# Altium PCB Arduino_DIY_V1.0.PcbDoc (part 3 of 3)
Units mil, origin at the board's own origin, x right, y up, seen from the top; angles counter-clockwise.
Board outline 4035.9 x 4932.05 mil, 2 copper layers (Top Layer, Bottom Layer), stack 46.063 mil thick; 122 components, 93 nets, 431 pads, 264 vias.
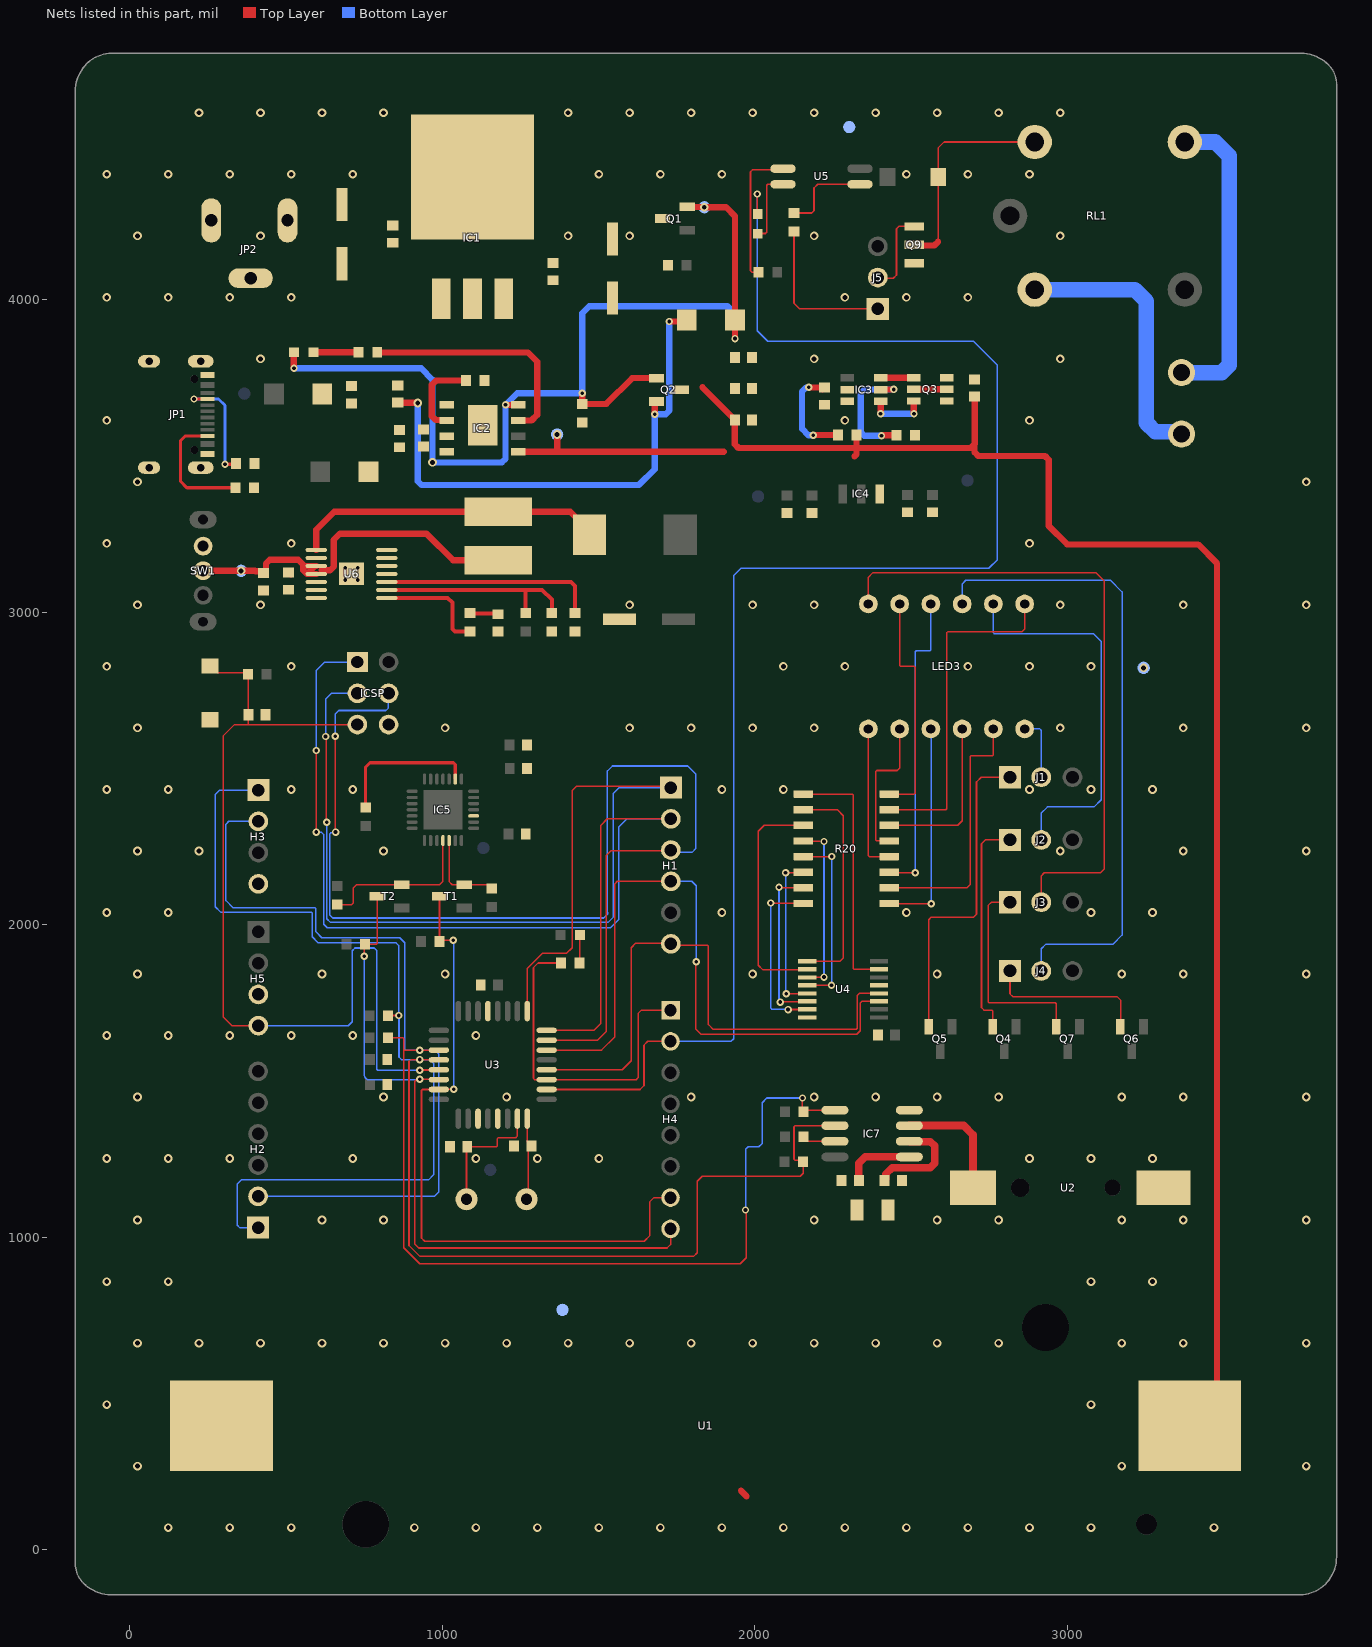
[diagram p2: the nets of this part, all layers, seen from the top]

## Via types
v1: diameter 27.56, hole 15.75, Top Layer to Bottom Layer, tented both sides, 182 vias
v2: diameter 23.62, hole 11.81, Top Layer to Bottom Layer, tented both sides, 69 vias
v3: diameter 27.56, hole 15.75, Top Layer to Bottom Layer, tented top, 9 vias
v4: diameter 24, hole 12, Top Layer to Bottom Layer, tented both sides, 4 vias

## Nets (pads, with @x,y where several pads share a name; then routed paths per layer and width w, separated by ;. In a path a pad name is that pad's centre, name@x,y a point inside that pad or via, vN(x,y) a via of type N, cw(c..) or ccw(c..) an arc to the next point about the centre after c; other vN are vias at no path point) (continued)
GND: C1.1 C2.1 C3.2 C4.2 C5.1 C6.1 C7.1 C9.1 C10.1 C11.1 C13.1 C14.1 C15.2 C16.1 C17.1 C18.1 C19.1 C20.1 C21.1 C22.1 C23.1 C24.1 C25.2 C26.2 C27.1 C28.1 C29.1 C30.2 C31.2 C32.2 C33.2 H3.4 H5.3 IC1.2 IC1.4 IC2.1 IC2.3 IC2.9 IC4.1 IC5.3 IC7.4 ICSP.4 JP1.17 JP1.18 JP1.19 JP1.20 JP1.A12B1 JP1.B12A1 JP2.2 JP2.3 Q3.1 Q9.3 R1.1 R2.1 R3.1 R6.1 R7.1 R8.1 R26.1 R27.1 RESET.2 TP9.1 TP10.1 TP11.1 U2.2 U3.3 U3.5 U3.21 U4.8 U4.13 U6.6 U6.7 U6.11 U6.12 U6.13 U6.14 U6.15
  other v1: 123.65,70.69 320.5,70.69 517.35,70.69 911.05,70.69 1107.9,70.69 1304.75,70.69 1501.6,70.69 1698.45,70.69 1895.3,70.69 2092.15,70.69 2289,70.69 2485.85,70.69 2682.7,70.69 2879.55,70.69 3076.4,70.69 3470.1,70.69 25.22,267.54 3174.83,267.54 3765.38,267.54 -73.2,464.39 3076.4,464.39 25.22,661.24 222.07,661.24 418.92,661.24 615.77,661.24 812.62,661.24 1009.47,661.24 1206.32,661.24 1403.17,661.24 1600.02,661.24 1796.87,661.24 1993.72,661.24 2190.57,661.24 2387.43,661.24 2584.28,661.24 2781.13,661.24 3174.83,661.24 3371.68,661.24 3765.38,661.24 -73.2,858.09 123.65,858.09 3076.4,858.09 3273.25,858.09 25.22,1054.94 615.77,1054.94 812.62,1054.94 2190.57,1054.94 2584.28,1054.94 2781.13,1054.94 3174.83,1054.94 3371.68,1054.94 3765.38,1054.94 -73.2,1251.8 123.65,1251.8 320.5,1251.8 714.2,1251.8 1107.9,1251.8 1304.75,1251.8 1501.6,1251.8 2879.55,1251.8 3076.4,1251.8 3273.25,1251.8 25.22,1448.65 812.62,1448.65 1206.32,1448.65 1796.87,1448.65 2190.57,1448.65 2387.43,1448.65 2584.28,1448.65 2781.13,1448.65 3174.83,1448.65 3371.68,1448.65 3765.38,1448.65 -73.2,1645.5 123.65,1645.5 320.5,1645.5 517.35,1645.5 714.2,1645.5 1107.9,1645.5 25.22,1842.35 615.77,1842.35 1009.47,1842.35 1993.72,1842.35 2584.28,1842.35 3174.83,1842.35 3371.68,1842.35 3765.38,1842.35 -73.2,2039.2 123.65,2039.2 1895.3,2039.2 2485.85,2039.2 3076.4,2039.2 3273.25,2039.2 25.22,2236.05 222.07,2236.05 812.62,2236.05 2977.98,2236.05 3371.68,2236.05 3765.38,2236.05 -73.2,2432.9 123.65,2432.9 517.35,2432.9 714.2,2432.9 1895.3,2432.9 2092.15,2432.9 2879.55,2432.9 3076.4,2432.9 3273.25,2432.9 25.22,2629.75 1009.47,2629.75 1600.02,2629.75 1796.87,2629.75 1993.72,2629.75 2190.57,2629.75 2977.98,2629.75 3371.68,2629.75 3765.38,2629.75 -73.2,2826.6 517.35,2826.6 2092.15,2826.6 2289,2826.6 2682.7,2826.6 2879.55,2826.6 3076.4,2826.6 25.22,3023.45 418.92,3023.45 1600.02,3023.45 1993.72,3023.45 2190.57,3023.45 2977.98,3023.45 3371.68,3023.45 3765.38,3023.45 -73.2,3220.3 517.35,3220.3 2879.55,3220.3 25.22,3417.15 3765.38,3417.15 -73.2,3614 2289,3614 2879.55,3614 418.92,3810.85 2190.57,3810.85 2977.98,3810.85 -73.2,4007.7 123.65,4007.7 320.5,4007.7 517.35,4007.7 2289,4007.7 2485.85,4007.7 2682.7,4007.7 25.22,4204.55 418.92,4204.55 1403.17,4204.55 1600.02,4204.55 2190.57,4204.55 2977.98,4204.55 -73.2,4401.4 123.65,4401.4 320.5,4401.4 517.35,4401.4 714.2,4401.4 1501.6,4401.4 1698.45,4401.4 1895.3,4401.4 2485.85,4401.4 2682.7,4401.4 2879.55,4401.4 222.07,4598.25 418.92,4598.25 615.77,4598.25 812.62,4598.25 1403.17,4598.25 1600.02,4598.25 1796.87,4598.25 1993.72,4598.25 2190.57,4598.25 2387.43,4598.25 2584.28,4598.25 2781.13,4598.25 2977.98,4598.25
  other v3: 3245,2822
  other v4: 690.46,3102.8 729.83,3102.8 690.46,3142.17 729.83,3142.17
MISO: H1.2 ICSP.1 U3.16 | length 3457
  Top Layer w5: v2@597.15,2295.49 v2(597.15,2557.49) ; U3.16@1334.65,1661.73 1485.38,1661.73 1508.15,1684.49 1508.15,2318.49 1528.5,2338.85 H1.2@1731.94,2338.85
  Bottom Layer w5: v2@597.15,2295.49 614.15,2295.49 621.14,2288.51 621.14,2001.51 632.15,1990.49 1539.15,1990.49 1565.15,2016.49 1565.15,2312.49 1591.5,2338.85 H1.2@1731.94,2338.85 ; v2(597.15,2557.49) 597.15,2813.49 624.15,2840.49 ICSP.1@728.87,2840.49
  other v2: 597.15,2296.49
MOSI: H1.3 ICSP.5 U3.15 | length 3848
  Top Layer w5: v2(658.15,2603.49) 658.65,2602.99 658.65,2296.99 v2(659.15,2296.49) ; U3.15@1334.65,1630.23 1496.89,1630.23 1525.15,1658.49 1525.15,2221.49 1540.15,2236.49 1729.58,2236.49 H1.3@1731.94,2238.85
  Bottom Layer w5: v2(658.15,2603.49) 658.15,2674.49 669.15,2685.49 820.15,2685.49 828.15,2693.49 828.15,2739.77 ICSP.5@828.87,2740.49 ; v2(659.15,2296.49) 656.92,2294.27 644.06,2294.27 641.14,2291.34 641.14,2030.51 650.15,2021.49 1517.15,2021.49 1530.08,2034.42 1530.08,2038.56 1529.15,2039.49 1529.15,2492.15 1545,2508 1786,2508 1812,2482 1812,2244 1799.35,2231.35 1743.14,2231.35 1741.29,2229.49 H1.3@1731.94,2238.85
NetC3_1: C3.1 C6.2 IC1.1 JP2.1
NetC4_1: C4.1 C5.2 IC1.3 Q1.3
NetC8_1: C8.1 C12.1 IC3.6 Q3.3 U1.2 | length 25.5
  Top Layer w20: 1956.15,189.49 1974.15,171.49
NetC8_2: C8.2 IC3.5 R5.1 | length 329.8
  Top Layer w20: v2(2173,3720) 2173.48,3719.52 2215.43,3719.52 2217.54,3717.41 2217.54,3713.44 C8.2@2223.15,3719.05 ; v2(2188,3566) 2188.98,3566 2189.98,3567 R5.1@2267,3567 ; IC3.5@2295.9,3714.3 IC3.5@2296.99,3712.49
  Bottom Layer w20: v2(2173,3720) 2172.31,3719.31 2164.83,3719.31 2152,3706.47 2152,3587 2172.31,3566.69 2187.31,3566.69 v2(2188,3566)
NetC9_2: C9.2 C10.2 C11.2 C12.2 IC2.5 Q2.3 R5.2 TP3.1 U1.1 | length 5947.2
  Top Layer w20: IC2.5@1243.65,3513.49 1368.15,3513.49 ; v3(1368.15,3568.84) 1368.15,3513.49 ; 1833.15,3719.55 C11.2@1936.81,3615.88 ; 1901.15,3513.49 1368.15,3513.49 ; C11.2@1936.81,3615.45 1936.81,3537.21 1948.53,3525.49 2326.31,3525.49 ; 2320,3499 2326.31,3505.31 2326.31,3525.49 ; R5.2@2326.31,3567 2326.31,3525.49 ; C12.2@2704.15,3689.94 C12.2@2704.15,3677.91 ; U1.1@3392.16,396.49 3480,484.33 3480,3156 3419,3217 3000,3217 2941,3276 2941,3488.28 2929.28,3500 2715.72,3500 2704,3511.72 2704,3538.35 ; 2326.31,3525.49 2691.15,3525.49 2704,3538.35 ; 2704,3538.35 2704.15,3538.49 C12.2@2704.15,3677.91 ; 2704,3538.35 2704,3677.76 C12.2@2704.15,3677.91
NetC14_2: C14.2 L1.1 SW1.2 TP4.1 U6.3 U6.4 | length 1189.7
  Top Layer w20: SW1.2@235.15,3132.84 235.32,3132.67 356.97,3132.67 v3(357.15,3132.49) 400.93,3132.49 402.62,3130.8 423.4,3130.8 C14.2@429.15,3125.05 431.12,3125.05 436.86,3130.8 436.86,3156.14 448.58,3167.86 539.47,3167.86 556.05,3151.27 556.05,3134.21 567.76,3122.49 578.04,3122.49 U6.4@597.32,3122.49 ; 556.05,3148.08 U6.3@597.32,3148.08 ; 578.04,3132.39 U6.3@593.74,3148.08 ; 614.31,3134.49 641.43,3134.49 653.15,3146.21 653.15,3231.49 673.15,3251.49 950.15,3251.49 1035.15,3166.49 L1.1@1180.15,3166.49
NetC20_2: C20.2 U6.5 | length 10.1
  Top Layer w20: C20.2@509.15,3127.05 514.9,3121.3 C20.2@516.86,3121.3
NetC21_2: C21.2 R25.1 | length 91.8
  Top Layer w13: R25.1@1089.15,2997.84 1091.29,2995.7 1177,2995.7 C21.2@1179.15,2993.55
NetC31_1: C31.1 IC7.2 X2.2 | length 335.1
  Top Layer w24: C31.1@2416.15,1181.84 2419.89,1185.59 2419.89,1202.24 2440.15,1222.49 2562.09,1222.49 2576.15,1236.55 2576.15,1292.1 2562.09,1306.16 2495.83,1306.16 IC7.2@2495.15,1306.84
NetC32_1: C32.1 IC7.1 X2.1 | length 224.8
  Top Layer w24: C32.1@2333.7,1181.84 2333.65,1181.9 2333.65,1236.84 2353.65,1256.84 IC7.1@2495.15,1256.84
NetD4_2: D4.2 L1.2 U6.1 U6.2 | length 1000.6
  Top Layer w20: U6.1@597.32,3199.27 597.32,3263.67 655.15,3321.49 L1.2@1180.15,3321.49 1409.83,3321.49 1472.02,3259.3 D4.2@1472.02,3247.49
NetD5_2: D5.2 Q9.2 RL1.4 | length 699.2
  Top Layer w5: 2587.15,4185.21 D5.2@2587.15,4392.49 2587.15,4485.49 2606.37,4504.71 RL1.4@2896.36,4504.71
  Top Layer w20: Q9.2@2511.15,4175.55 2513.2,4173.49 2575.43,4173.49 2587.15,4185.21
NetH2_1: H2.1 H3.1 IC7.6 R19.1 R23.1 U3.28 | length 5405.3
  Top Layer w5: R23.1@826.46,1708.85 827.11,1709.49 v2(860.84,1709.49) ; v2(928.15,1568.49) 900.15,1568.49 894.15,1562.49 894.15,973.49 929.15,938.49 1804.15,938.49 1816.15,950.49 1816.15,1179.49 1832.15,1195.49 2146.15,1195.49 2155.46,1204.8 R19.1@2155.46,1241.84 2150.81,1246.49 2129.08,1246.49 2126.15,1249.42 2126.15,1353.92 2129.08,1356.84 IC7.6@2257.15,1356.84 ; v2@933.15,1568.49 933.77,1567.87 989.02,1567.87 U3.28@989.65,1567.24
  Bottom Layer w5: H2.1@411.15,1030.85 351.8,1030.85 344.15,1038.49 344.15,1170.49 357.15,1183.49 956.15,1183.49 973.15,1200.49 973.15,1556.12 960.77,1568.49 v2(928.15,1568.49) 870.15,1568.49 862.15,1576.49 862.15,1708.18 v2(860.84,1709.49) 860.84,1933.8 852.15,1942.49 603.15,1942.49 584.15,1961.49 584.15,2037.56 581.22,2040.49 291.15,2040.49 274.15,2057.49 274.15,2416.49 288.5,2430.85 H3.1@411.93,2430.85
NetH2_2: H2.2 H3.2 IC7.5 R18.1 R24.1 U3.27 | length 5278.7
  Top Layer w5: R24.1@826.46,1638.85 874.22,1638.85 877.15,1635.92 877.15,1598.74 ; U3.27@989.65,1598.74 877.15,1598.74 ; v2(1971,1087) 1973.15,1084.85 1973.15,934.49 1954.15,915.49 928.15,915.49 877.15,966.49 877.15,1598.74 ; v2(2153.15,1445.49) 2153.15,1404.84 R18.1@2156.15,1401.84 2161.15,1406.84 IC7.5@2257.15,1406.84
  Bottom Layer w5: H2.2@411.15,1130.85 975.5,1130.85 989.34,1144.68 989.34,1586.3 976.9,1598.74 v2@935.15,1598.74 ; H3.2@411.93,2330.85 317.5,2330.85 308.15,2321.49 308.15,2077.49 331.15,2054.49 593.22,2054.49 596.15,2051.56 596.15,1977.49 615.15,1958.49 864.15,1958.49 880.15,1942.49 880.15,1601.67 883.08,1598.74 v2(928.15,1598.74) ; v2(1971,1087) 1971.15,1087.15 1971.15,1281.15 1979.49,1289.49 2013.49,1289.49 2024.15,1300.15 2024.15,1430.49 2039.15,1445.49 v2(2153.15,1445.49)
NetH6_1: H6.1 RL1.1 | length 889.2
  Bottom Layer w50: RL1.1@2896.36,4032.27 3216.37,4032.27 3253.15,3995.49 3253.15,3606.36 3282.44,3577.07 3359.14,3577.07 H6.1@3366.15,3570.07
NetH6_2: H6.2 RL1.3 | length 992.1
  Bottom Layer w50: H6.2@3366.15,3766.92 3494.59,3766.92 3518.81,3791.14 3518.81,4459.83 3473.95,4504.69 RL1.3@3376.68,4504.69
NetIC2_2: IC2.2 R6.2 | length 268.3
  Top Layer w20: IC2.2@1014.65,3613.49 1012.84,3615.3 978.86,3615.3 967.15,3627.02 967.15,3727.85 980.79,3741.49 R6.2@1075.84,3741.49
NetIC2_7: IC2.7 R4.2 | length 762.1
  Top Layer w20: R4.2@792.46,3831.49 1274.15,3831.49 1304.15,3801.49 1304.15,3631.49 1286.15,3613.49 IC2.7@1243.65,3613.49
NetIC3_1: IC3.1 Q3.6 | length 187.7
  Top Layer w20: v2(2403.15,3635.49) 2403.3,3635.65 IC3.1@2403.3,3675.1 ; Q3.6@2509.15,3676.1 2509.65,3675.6 2509.65,3635.99 v2(2510.15,3635.49)
  Bottom Layer w20: v2(2403.15,3635.49) v2(2510.15,3635.49)
NetIC3_2: IC3.2 R7.2 | length 396.3
  Top Layer w20: IC3.2@2403.3,3712.49 2403.55,3712.75 2444.75,3712.75 v2(2445,3713) ; v2(2406,3565) 2407,3566 R7.2@2454,3566
  Bottom Layer w20: v2(2406,3565) 2351.09,3565 2339.37,3576.72 2339.37,3700.28 2351.09,3712 2370,3712 2371,3713 v2(2445,3713)
NetIC3_3: IC3.3 Q3.4 | length 106.3
  Top Layer w20: IC3.3@2403.3,3749.89 2403.8,3750.39 2508.65,3750.39 Q3.4@2509.15,3750.89
NetIC5_9: IC5.9 R14.1 | length 471
  Top Layer w10: R14.1@755.15,2375.15 755.15,2504.49 769.15,2518.49 1036.27,2518.49 1042.13,2512.64 IC5.9@1042.13,2466.22
NetIC7_3: IC7.3 U2.1 | length 385.5
  Top Layer w25: IC7.3@2495.15,1356.84 2495.8,1357.49 2669.15,1357.49 2698.57,1328.07 U2.1@2698.57,1158.49
NetIC7_7: IC7.7 R17.1 | length 107.8
  Top Layer w5: R17.1@2156.15,1321.84 2156.15,1320.87 2169.52,1307.49 2256.5,1307.49 IC7.7@2257.15,1306.84
NetJ1_1: J1.1 Q5.2 | length 1039.8
  Top Layer w5: Q5.2@2556.91,1673.8 2556.91,2016.25 2565.15,2024.49 2701.15,2024.49 2710,2033.35 2710,2457 2725.06,2472.06 J1.1@2817.31,2472.06
NetJ1_2: J1.2 LED3.6 | length 205.2
  Bottom Layer w5: LED3.6@2864.15,2626.49 2913.15,2626.49 2917.31,2622.33 J1.2@2917.31,2472.06
NetJ2_1: J2.1 Q4.2 | length 710.8
  Top Layer w5: Q4.2@2761.6,1673.8 2761.6,1724.07 2758.67,1727 2734,1727 2726,1735 2726,2259 2738.27,2271.27 J2.1@2817.31,2271.27
NetJ2_2: J2.2 LED3.8 | length 1251.2
  Bottom Layer w5: LED3.8@2764.15,3026.49 2764.15,2933.93 2767.08,2931 3084.86,2931 3109.15,2906.71 3109.15,2400.15 3086,2377 2937,2377 2917.15,2357.15 2917.15,2271.43 J2.2@2917.31,2271.27
NetJ3_1: J3.1 Q7.2 | length 675.9
  Top Layer w5: J3.1@2817.31,2072.06 2757.71,2072.06 2747.15,2061.49 2747.15,1752.93 2750.08,1750 2961.98,1750 2964.91,1747.07 Q7.2@2964.91,1674.43
NetJ3_2: J3.2 LED3.12 | length 2074.8
  Top Layer w5: LED3.12@2364.15,3026.49 2364.15,3112.15 2379,3127 3092,3127 3119.15,3099.85 3119.15,2178.29 3106.85,2166 2927,2166 2917.31,2156.31 J3.2@2917.31,2072.06
NetJ4_1: J4.1 Q6.2 | length 521
  Top Layer w5: J4.1@2817.31,1852.06 2817.31,1778.69 2826,1770 3160,1770 3171,1759 3171,1675.2 Q6.2@3169.6,1673.8
NetJ4_2: J4.2 LED3.9 | length 2041.9
  Bottom Layer w5: LED3.9@2664.15,3026.49 2664.15,3090.3 2675.93,3102.08 3138.92,3102.08 3176,3065 3176,1967 3146,1937 2931,1937 2917.31,1923.31 J4.2@2917.31,1852.06
NetJ5_1: J5.1 R22.2 | length 505
  Top Layer w5: R22.2@2126.15,4218.18 2126.15,3988.49 2143.8,3970.84 J5.1@2394.15,3970.84
NetJ5_2: J5.2 Q9.1 | length 273.7
  Top Layer w5: J5.2@2394.15,4070.84 2396.57,4068.42 2443.36,4068.42 2454.15,4079.21 2454.15,4227.49 2461.26,4234.6 Q9.1@2511.15,4234.6
NetJP1_A5: JP1.A5 R1.2 | length 375.6
  Top Layer w10: v2(206.15,3682.49) 206.37,3682.27 249.75,3682.27 JP1.A5@249.97,3682.06 ; v2(305.15,3473.49) 337.49,3473.49 R1.2@339.84,3475.84
  Bottom Layer w10: v2(206.15,3682.49) 284.51,3682.49 305.15,3661.85 v2(305.15,3473.49)
NetJP1_B5: JP1.B5 R2.2 | length 408.1
  Top Layer w10: JP1.B5@249.97,3563.95 177.6,3563.95 163.15,3549.49 163.15,3418.49 183.15,3398.49 R2.2@339.15,3398.49
NetLED1_2: LED1.2 R4.1 | length 144.7
  Top Layer w10: R4.1@732.79,3831.85 R4.1@733.15,3831.49
  Top Layer w20: LED1.2@588.62,3831.85 R4.1@732.79,3831.85
NetLED2_2: LED2.2 R16.2 | length 90.6
  Top Layer w5: R16.2@1439.84,1877.54 1439.84,1966.07 LED2.2@1441.32,1967.54
NetLED3_1: LED3.1 R20.12 | length 473.5
  Top Layer w5: LED3.1@2364.15,2626.49 2364.15,2220.99 2367.08,2218.06 R20.12@2430.91,2218.06
NetLED3_2: LED3.2 R20.13 | length 469.1
  Top Layer w5: R20.13@2430.91,2268.06 2391.08,2268.06 2388.15,2270.99 2388.15,2490.56 2391.08,2493.49 2456.15,2493.49 2464.15,2501.49 LED3.2@2464.15,2626.49
NetLED3_3: LED3.3 R20.9 | length 693.9
  Top Layer w5: R20.9@2430.91,2068.06 2431.47,2067.49 v2(2565.15,2067.49)
  Bottom Layer w5: LED3.3@2564.15,2626.49 2564.65,2625.99 2564.65,2067.99 v2(2565.15,2067.49)
NetLED3_4: LED3.4 R20.14 | length 533.2
  Top Layer w5: R20.14@2430.91,2318.06 2649.71,2318.06 2664.15,2332.49 LED3.4@2664.15,2626.49
NetLED3_5: LED3.5 R20.10 | length 832.1
  Top Layer w5: R20.10@2430.91,2118.06 2679.71,2118.06 2690.15,2128.49 2690.15,2538.07 2693.08,2541 2761.22,2541 2764.15,2543.93 LED3.5@2764.15,2626.49
NetLED3_7: LED3.7 R20.15 | length 1082.9
  Top Layer w5: R20.15@2430.91,2368.06 2611.78,2368.06 2614.71,2370.99 2614.71,2934.07 2617.64,2937 2855,2937 2864.15,2946.15 LED3.7@2864.15,3026.49
NetLED3_10: LED3.10 R20.11 | length 990.5
  Top Layer w5: R20.11@2430.91,2168.06 2432.47,2166.49 v2(2514.15,2166.49)
  Bottom Layer w5: v2(2514.15,2166.49) 2514.15,2873.56 2517.08,2876.49 2561.22,2876.49 2564.15,2879.42 LED3.10@2564.15,3026.49
NetLED3_11: LED3.11 R20.16 | length 736.5
  Top Layer w5: R20.16@2430.91,2418.06 2511.22,2418.06 2514.15,2420.99 2514.15,2823.55 2511.22,2826.48 2467.08,2826.48 2464.15,2829.41 LED3.11@2464.15,3026.49
NetLED4_1: LED4.1 U5.2 | length 234.4
  Top Layer w5: LED4.1@2010.15,4211.37 2010.75,4211.97 2034.85,4211.97 2039.15,4216.26 2039.15,4366.56 2042.08,4369.49 U5.2@2091,4369.49
NetQ3_2: Q3.2 Q3.5 | length 106.3
  Top Layer w20: Q3.5@2509.15,3713.49 Q3.2@2615.46,3713.49
NetR9_1: R9.1 R26.2 U6.9 | length 657.5
  Top Layer w13: U6.9@822.97,3071.31 1266.15,3071.31 ; R9.1@1267.16,2997.84 1267.16,3070.3 1266.15,3071.31 ; R26.2@1351.16,2997.84 1351.16,3040.48 1320.33,3071.31 1266.15,3071.31
NetR20_1: R20.1 U4.15 | length 800.2
  Top Layer w5: R20.1@2155.71,2418.06 2313.07,2418.06 2316,2415.13 2316,1859.99 2318.93,1857.06 U4.15@2398.31,1857.06
NetR20_2: R20.2 U4.1 | length 711.6
  Top Layer w5: R20.2@2155.71,2368.06 2264.94,2368.06 2284,2349 2284,1893.75 2273.31,1883.06 U4.1@2168.31,1883.06
NetR20_3: R20.3 U4.2 | length 743.6
  Top Layer w5: R20.3@2155.71,2318.06 2031.06,2318.06 2012,2299 2012,1870 2026.51,1855.49 2166.74,1855.49 U4.2@2168.31,1857.06
NetR20_4: R20.4 U4.3 | length 543.7
  Top Layer w5: R20.4@2155.71,2268.06 2157.27,2266.49 2208.15,2266.49 ; U4.3@2168.31,1831.06 2169.03,1831.78 2221.43,1831.78 v2(2222.15,1832.49)
  Bottom Layer w5: v2(2222.15,1832.49) v2@2222.15,2268.63
  other v2: 2222.15,2266.49
NetR20_5: R20.5 U4.4 | length 582.4
  Top Layer w5: R20.5@2155.71,2218.06 2246.71,2218.06 v2(2247.15,2218.49) ; U4.4@2168.31,1806.06 2168.53,1806.28 2245.93,1806.28 v2(2246.15,1806.49)
  Bottom Layer w5: v2(2246.15,1806.49) 2245.72,1806.92 2245.72,1811.06 2247.15,1812.49 v2(2247.15,2218.49)
NetR20_6: R20.6 U4.5 | length 512.4
  Top Layer w5: v2(2099.15,2166.49) 2154.15,2166.49 R20.6@2155.71,2168.06 ; v2(2101.15,1779.49) 2101.43,1779.78 2168.03,1779.78 U4.5@2168.31,1780.06
  Bottom Layer w5: v2(2099.15,2166.49) 2099.15,1781.49 v2(2101.15,1779.49)
NetR20_7: R20.7 U4.6 | length 534
  Top Layer w5: v2(2078.15,2119.49) 2079.15,2118.49 2082.15,2118.49 2082.58,2118.06 R20.7@2155.71,2118.06 ; v2(2082.15,1752.49) 2083.43,1753.78 2167.03,1753.78 U4.6@2168.31,1755.06
  Bottom Layer w5: v2(2078.15,2119.49) 2078.15,1759.49 2082.15,1755.49 v2(2082.15,1752.49)
NetR20_8: R20.8 U4.7 | length 559.2
  Top Layer w5: v2(2052.15,2069.49) 2053.15,2068.49 2063.15,2068.49 2063.58,2068.06 R20.8@2155.71,2068.06 ; v2(2107.15,1728.49) 2107.43,1728.78 2168.03,1728.78 U4.7@2168.31,1729.06
  Bottom Layer w5: v2(2052.15,2069.49) 2052.15,1732.42 2055.08,1729.49 2105.15,1729.49 2106.15,1728.49 v2(2107.15,1728.49)
NetR21_1: R21.1 U5.1 | length 452.8
  Top Layer w5: R21.1@2013.15,4088.49 1991.2,4088.49 1986.9,4092.8 1986.9,4409.24 1993.15,4415.49 2087,4415.49 U5.1@2091,4419.49
NetR22_1: R22.1 U5.3 | length 292
  Top Layer w5: R22.1@2126.15,4277.49 2183.15,4277.49 2190.15,4284.49 2190.15,4357.49 2202.15,4369.49 U5.3@2337.3,4369.49
NetR25_2: R25.2 U6.8 | length 360
  Top Layer w13: U6.8@822.97,3045.72 1017.92,3045.72 1033.15,3030.49 1033.15,2946.15 1040.76,2938.53 R25.2@1089.15,2938.53
NetR27_2: R27.2 U6.10 | length 694
  Top Layer w13: U6.10@822.97,3096.9 1412.74,3096.9 1425.15,3084.49 R27.2@1425.15,2997.84
PD7: H4.1 R16.1 U3.11 | length 1101.7
  Top Layer w5: R16.1@1380.53,1877.54 1307.19,1877.54 1292.46,1862.8 1292.46,1508.18 1296.39,1504.25 U3.11@1334.65,1504.25 1620.9,1504.25 1627,1510.35 1627,1716 1637.73,1726.73 H4.1@1731.15,1726.73
RELAY: H4.2 LED4.2 U3.10 | length 5028
  Top Layer w5: U3.10@1334.65,1472.75 1633.41,1472.75 1646,1485.35 1646,1615 1657.73,1626.73 H4.2@1731.15,1626.73 ; v2(2008.15,4338.49) 2008.15,4276.32 LED4.2@2010.14,4274.32
  Bottom Layer w5: H4.2@1731.15,1626.73 1924.39,1626.73 1933.15,1635.49 1933.15,3117.49 1956.15,3140.49 2749.49,3140.49 2777,3168 2777,3790 2700.1,3866.9 2042.1,3866.9 2008.15,3900.85 v2(2008.15,4338.49)
RESET: C30.1 H5.4 ICSP.3 R15.1 RESET.1 U3.29 | length 2957.7
  Top Layer w5: RESET.1@257.65,2827.87 281.92,2806.49 364.96,2806.49 R15.1@378.34,2801.85 379.89,2787.34 379.89,2687.06 C30.1@380.09,2671.85 379.56,2671.31 379.56,2640.49 ; H5.4@411.93,1677.01 327.63,1677.01 299.15,1705.49 299.15,2604.15 335.49,2640.49 379.56,2640.49 ; ICSP.3@728.87,2640.49 379.56,2640.49 ; v2@928.15,1535.12 989.02,1535.12 U3.29@989.65,1535.75
  Bottom Layer w5: H5.4@411.93,1677.01 699.67,1677.01 712.15,1689.49 712.15,1916.49 721.15,1925.49 783.15,1925.49 791.15,1917.49 791.15,1537.42 794.08,1534.49 v2(928.15,1534.49)
RX: H4.7 R11.1 T1.3 U3.31 | length 2167
  Top Layer w5: R11.1@991.15,1946.49 R11.1@991.78,1947.12 ; T1.3@991.78,2090.84 R11.1@991.78,1947.12 ; v2(1036.15,1950.49) 995.15,1950.49 R11.1@991.78,1947.12 ; v2(1037.15,1473.49) 1036.78,1473.12 990.02,1473.12 U3.31@989.65,1472.75 937.08,1472.75 934.15,1469.82 934.15,997.49 944.15,987.49 1647.15,987.49 1665.15,1005.49 1665.15,1113.98 1677.91,1126.73 H4.7@1731.15,1126.73
  Bottom Layer w5: v2(1036.15,1950.49) 1036.65,1949.99 1036.65,1473.99 v2(1037.15,1473.49)
RX_TO_MCU: IC5.25 R10.1 T2.2 | length 528
  Top Layer w5: R10.1@664.15,2064.18 709.84,2064.18 716.15,2070.49 716.15,2118.49 725.9,2128.24 T2.2@870.52,2128.24 991.9,2128.24 1002.73,2139.07 IC5.25@1002.73,2269.37
SCK: H1.1 ICSP.2 U3.17 | length 3463.8
  Top Layer w5: v2(627.15,2602.49) 629.15,2600.49 629.15,2329.49 v2(631.15,2327.49) ; U3.17@1272.38,1723.49 1272.77,1723.88 1272.77,1860.11 1321.15,1908.49 1398.15,1908.49 1416.15,1926.49 1416.15,2429.49 1430.15,2443.49 1727.29,2443.49 H1.1@1731.94,2438.85
  Bottom Layer w5: v2(627.15,2602.49) 627.15,2721.49 646.15,2740.49 ICSP.2@728.87,2740.49 ; v2(631.15,2327.49) 631.15,2295.49 631.14,2019.51 643.15,2007.49 1531.15,2007.49 1548.15,2024.49 1548.15,2420.49 1566.5,2438.85 H1.1@1731.94,2438.85
SH_CP: H1.4 U3.14 U4.11 | length 2143.1
  Top Layer w5: U3.14@1334.65,1598.74 1510.39,1598.74 1552.15,1640.49 1552.15,2130.49 1560.5,2138.85 H1.4@1731.94,2138.85 ; v2(1813,1882) 1812.15,1881.15 1812.15,1665.49 1828.15,1649.49 2327.15,1649.49 2338.15,1660.49 2338.15,1749.49 2343.71,1755.06 U4.11@2398.31,1755.06
  Bottom Layer w5: H1.4@1731.94,2138.85 1798.8,2138.85 1813,2124.64 v2(1813,1882)
ST_CP: H1.6 U3.12 U4.12 | length 1813.4
  Top Layer w5: U3.12@1334.65,1535.75 1576.4,1535.75 1605.15,1564.49 1605.15,1926.49 1619.15,1940.49 1730.29,1940.49 H1.6@1731.94,1938.85 1736.29,1934.49 1849.22,1934.49 1852.15,1931.56 1852.15,1680.49 1867.15,1665.49 2325.22,1665.49 2328.15,1668.42 2328.15,1773.49 2334.71,1780.06 U4.12@2398.31,1780.06
TX: H4.8 R12.1 T2.3 U3.30 | length 2256.7
  Top Layer w5: v2(751.15,1899.49) 751.15,1935.49 R12.1@753.15,1937.49 ; 769.46,1937.84 789.29,1937.84 792.22,1940.77 T2.3@792.22,2090.84 ; v2(928.15,1505.49) 924.58,1501.93 915.75,1501.93 912.15,1498.33 912.15,978.49 925.15,965.49 1719.91,965.49 1731.15,976.74 H4.8@1731.15,1026.73 ; v2@935.15,1505.49 935.77,1504.87 989.03,1504.87 U3.30@989.65,1504.25
  Bottom Layer w5: v2(751.15,1899.49) 751.15,1519.94 ccw(c767.59,1519.94) 767.59,1503.49 v2@933.15,1503.49
TX_TO_MCU: IC5.26 R13.1 T1.2 | length 277.1
  Top Layer w5: IC5.26@1022.43,2269.37 1022.43,2138.21 1032.4,2128.24 T1.2@1070.52,2128.24 1146.75,2128.24 R13.1@1159.15,2115.84
VCC: C7.2 C13.2 D2.2 D3.1 IC2.4 IC2.8 LED1.1 Q1.2 Q2.1 R8.2 TP2.1 | length 3194.4
  Top Layer w20: LED1.1@525.67,3831.84 525.67,3780.97 v2(526.15,3780.49) ; v2(1203.15,3663.49) IC2.8@1243.65,3663.49 ; v2(1448.15,3700.49) R8.2@1448.15,3666.49 1525.15,3666.49 1607.95,3749.3 Q2.1@1686.15,3749.3 ; Q1.2@1783.88,4297.25 1784.49,4296.64 1838.36,4296.64 v3(1838.97,4296.03) 1908.61,4296.03 1937.31,4267.33 D2.2@1937.31,3935.54 v2(1937.31,3875.66)
  Bottom Layer w20: v2(526.15,3780.49) 933.15,3780.49 969.15,3744.49 v1(969.15,3479.49) 1191.43,3479.49 1203.15,3491.21 v2(1203.15,3663.49) 1240.15,3700.49 v2(1448.15,3700.49) 1448.15,3956.49 1470.98,3979.33 1913.31,3979.33 1937.31,3955.33 v2(1937.31,3875.66)
VIN: C1.2 C2.2 D1.1 D2.1 Q2.2 SW1.1 | length 1713.9
  Top Layer w20: C1.2@858.15,3670.94 858.87,3670.22 921.42,3670.22 v1(922.15,3669.49) ; v2(1680.15,3633.49) 1680.84,3634.19 1680.84,3670.71 1684.62,3674.49 Q2.2@1686.15,3674.49 ; v2(1727.15,3930.49) 1777.93,3930.49 D2.1@1782.98,3935.54
  Bottom Layer w20: v1(922.15,3669.49) 922.15,3419.21 933.86,3407.49 1630.15,3407.49 1680.15,3457.49 v2(1680.15,3633.49) 1715.43,3633.49 1727.15,3645.21 v2(1727.15,3930.49)
XTAL1: C25.1 U3.7 X1.2 | length 412.8
  Top Layer w5: X1.2@1078.08,1121.49 1078.08,1286.88 C25.1@1080.7,1289.49 1174.22,1289.49 1177.15,1292.42 1177.15,1315.56 1180.08,1318.49 1235.63,1318.49 1240.89,1323.75 U3.7@1240.89,1379.49
XTAL2: C26.1 U3.8 X1.1 | length 269.9
  Top Layer w5: X1.1@1270.21,1121.49 1276.15,1127.43 1276.15,1280.97 C26.1@1285.7,1290.52 ; U3.8@1272.38,1379.49 1272.38,1310.64 1272.45,1310.57 1272.45,1305.74 C26.1@1285.7,1292.49
  Top Layer w20: C26.1@1285.7,1290.52 C26.1@1285.7,1292.49
pads on no net: IC2.6 IC3.4 IC5.1 IC5.2 IC5.10 IC5.11 IC5.12 IC5.13 IC5.14 IC5.15 IC5.16 IC5.17 IC5.18 IC5.19 IC5.20 IC5.21 IC5.22 IC5.23 IC5.24 IC5.27 IC5.28 IC5.29 J1.3 J2.3 J3.3 J4.3 J5.3 JP1. JP1.A8 JP1.B8 RL1.2 SW1.3 SW1.4 U1. U2. U3.19 U3.22 U4.9

## Polygon pours and split planes (outlines as drawn)
GND on Bottom Layer "GND_L02_P000" (solid, remove dead copper, pour order 0): -147.74,-107.19 cw(c-85.45,-44.9) -173.55,-44.9 -173.55,4667.4 cw(c-48.88,4667.4) -137.03,4755.54 cw(c-57.84,4676.35) -57.84,4788.35 3748.41,4788.35 cw(c3748.41,4663.68) 3836.56,4751.83 cw(c3774.26,4689.54) 3862.36,4689.54 3862.36,-22.75 cw(c3737.7,-22.75) 3825.85,-110.9 cw(c3746.65,-31.71) 3746.65,-143.71 -59.59,-143.71 cw(c-59.59,-19.04)
GND on Top Layer "GND_L01_P001" (solid, remove dead copper, pour order 1): -147.74,-107.19 cw(c-85.45,-44.9) -173.55,-44.9 -173.55,4667.4 cw(c-48.88,4667.4) -137.03,4755.54 cw(c-57.84,4676.35) -57.84,4788.35 3748.41,4788.35 cw(c3748.41,4663.68) 3836.56,4751.83 cw(c3774.26,4689.54) 3862.36,4689.54 3862.36,-22.75 cw(c3737.7,-22.75) 3825.85,-110.9 cw(c3746.65,-31.71) 3746.65,-143.71 -59.59,-143.71 cw(c-59.59,-19.04)

## Keep-outs
Keep-Out Layer:
  circle w10: c6.39,4646.25 r78.74
  circle w10: c3682.43,4645.12 r78.74
  circle w10: c0,0 r78.74
  circle w10: c3678.55,0 r78.74
  pour cut-out: 3007.7,4784.4 3007.7,4159.64 2740,4159.64 2738,3868 3180,3868 3180,3457 3858.41,3458.59 3858.05,4697.27 3847.11,4731.65 3833.76,4749.04 3804.59,4770.53 3769.63,4782.52 3730.63,4784.4 3518.5,4784.4
  lines w7.87: -169.59,4377.4 -169.59,4667.4 cw(c-48.88,4667.4) -134.24,4752.75 cw(c-57.84,4676.35) -57.84,4784.4 3748.41,4784.4 cw(c3748.41,4663.68) 3833.76,4749.04 cw(c3774.26,4689.54) 3858.41,4689.54 3858.41,-1.6 ; -169.59,4646.25 -169.59,-44.9 ccw(c-85.45,-44.9) -144.95,-104.4 ccw(c-59.59,-19.04) -59.59,-139.75 3746.65,-139.75 ccw(c3746.65,-31.71) 3823.05,-108.11 ccw(c3737.7,-22.75) 3858.41,-22.75 3858.41,267.25

## Other copper
Top Layer:
  pour cut-out: -0.9,-117.21 cw(c-0.9,0.9) -119.01,0.9 cw(c-0.9,0.9) -0.9,119.01 cw(c-0.9,0.9) 117.21,0.9 cw(c-0.9,0.9)
  pour cut-out: 3677.65,-117.21 cw(c3677.65,0.9) 3559.54,0.9 cw(c3677.65,0.9) 3677.65,119.01 cw(c3677.65,0.9) 3795.76,0.9 cw(c3677.65,0.9)
  pour cut-out: 5.48,4529.04 cw(c5.48,4647.15) -112.63,4647.15 cw(c5.48,4647.15) 5.48,4765.26 cw(c5.48,4647.15) 123.59,4647.15 cw(c5.48,4647.15)
  pour cut-out: 3681.52,4527.92 cw(c3681.52,4646.03) 3563.41,4646.03 cw(c3681.52,4646.03) 3681.52,4764.14 cw(c3681.52,4646.03) 3799.63,4646.03 cw(c3681.52,4646.03)
  region net +5V: 1165.57,2421.86 1222.86,2421.86 1232.14,2431.14 1232.14,2442.81 1197.46,2442.81
  region net +5V_B: 1722,4022 1691,3991 1683,3991 1683,4024 1688,4029
  region net NetC9_2: 2309,3584 2309.21,3584.21 2343,3584.21 2343,3525.49 2322.56,3525.49 2309.05,3525.49
  region net NetC8_1: 2718,3788 3058,3788 3103,3743 3103,3425 3127,3401 3672,3401 3725,3348 3725,214.1 3638.9,128 3211.35,128 3207,217 3614,217 3635,238 3635,3288 3594,3329 3095,3329 3035,3389 3035,3687 2993,3729 2718,3729
  region net NetC9_2: 2873,3543 2935,3543 2985,3493 2985,3260 3009,3236 3489,3236 3556,3169 3556,517 3413,517 3411,519 3411,542 3418,542 3459,583 3459,3103 3393,3169 2965,3169 2916,3218 2916,3431 2878,3464 2859.18,3464
  region net NetC8_1: 2636,3822 2702,3822 2722.43,3801.57 2722.43,3728.87 2656.13,3728.87 2650,3728.87 2650,3738
  region net NetC8_1: 2722,3729 2650,3729 2650,3738 2593,3738 2593,3778.46 2587.46,3784 2374,3784 2374,3822 2636.54,3822
  region net +5V: 1230.15,1883.49 1231.15,1874.49 1231.15,1689.49 1221.15,1680.49 1220.15,1680.49 1148.15,1680.49 1132.15,1664.49 1132.15,1304.49 1137.15,1304.49 1157.15,1304.49 1161.15,1304.49 1162.15,1652.49 1168.15,1658.49 1242.15,1658.49 1255.15,1671.49 1255.15,1879.49 1253.15,1881.49
  region net +5V: 2056.15,4105.49 2088.15,4105.49 2088.15,3566.49 2062.15,3566.49 2056.15,3566.49
  region net +5V: 2083.15,1272.49 2065.15,1254.49 2065.15,1247.49 2090.15,1247.49 2091.15,1248.49
  region net +5V: 2080.15,1421.49 2115.15,1421.49 2115.15,1221.49 2080.15,1221.49
  region net +5V: 2115.15,1221.49 2037.15,1221.49 2036.15,1222.49 2036.15,1258.49 2115.15,1258.49
  region net +5V: 2252.15,1246.49 2252.15,1245.49 2233.15,1226.49 2228.21,1231.43 2228.21,1248.73
  region net +5V: 2213.15,1264.49 2221.15,1272.49 2301.15,1272.49 2301.15,1242.49 2217.34,1242.49
  region net +5V: 2213.15,1200.49 2238.15,1200.49 2238.15,1264.49 2213.15,1264.49
  region net NetC31_1: 2400.15,1201.26 2447.15,1201.26 2447.15,1051.49 2400.15,1051.49
  region net NetC32_1: 2306.15,1201.26 2351.15,1201.26 2351.15,1051.49 2306.15,1051.49
  region net +5V: 3153.55,1620.75 3218.55,1620.75 3218.55,1570.75 3153.55,1570.75
  region net +5V: 2952.15,1620.12 3017.15,1620.12 3017.15,1570.12 2952.15,1570.12
  region net +5V: 2748.15,1620.12 2813.15,1620.12 2813.15,1570.12 2748.15,1570.12
  region net +5V: 2544.15,1619.49 2609.15,1619.49 2609.15,1569.49 2544.15,1569.49
  region net +5V: 2368.15,1738.49 2458.15,1738.49 2458.15,1717.49 2368.15,1717.49
  region net +5V: 2368.15,1892.49 2458.15,1892.49 2458.15,1871.49 2368.15,1871.49
  region net +5V: 959.35,1864.69 974.95,1880.29 964.95,1890.29 952.95,1890.29
  region net +5V: 943.15,1931.49 943.15,1930.49 969.15,1904.49 959.15,1894.49 951.83,1894.49 925.84,1920.49
  region net +5V: 902.15,1903.49 902.15,1964.49 949.15,1964.49 949.15,1963.49 949.15,1903.49
  region net +3V3: 737.15,2219.49 710.15,2192.49 710.15,2190.49 750.15,2190.49 758.15,2198.49
  region net +3V3: 377.15,1908.49 377.15,1842.49 513.15,1842.49 540.15,1869.49 540.15,2137.49 558.15,2155.49 757.15,2155.49 772.15,2170.49 772.15,2332.49 734.15,2332.49 734.15,2201.49 507.15,2201.49 485.15,2179.49 485.15,2171.49 485.15,1923.49 473.15,1908.49
  region net +5V: 1168.15,2810.49 1200.15,2768.99 1226.15,2768.99 1264.65,2810.49
  region net +5V: 1287.15,2807.49 1330.15,2764.49 1391.15,2764.49 1435.15,2808.49 1437.15,2817.49
  region net +5V: 1255.15,2897.49 1224.15,2866.49 1224.15,2863.49 1273.15,2863.49 1274.15,2864.49
  region net +5V: 712.65,1887.99 752.15,1848.49 744.15,1840.49 694.01,1840.49 683.08,1851.42
  region net +5V: 1401.15,1939.49 1402.15,2859.49 1315.15,2859.49 1309.15,2865.49
  region net +5V: 1316.15,2803.49 1316.15,2006.49 1292.15,1982.49 1228.15,1982.49 1215.15,1969.49 1215.15,1921.49 1208.15,1914.49 910.15,1914.49 902.15,1906.49 902.15,1876.49 888.15,1862.49 713.61,1862.49 713.61,1954.49 667.15,1954.49 667.15,1843.49 681.15,1829.49 946.15,1829.49 961.15,1844.49 961.15,1876.49 1269.15,1876.49 1314.15,1921.49 1384.15,1921.49 1401.15,1939.49
  region net +5V: 1178.15,2505.49 1198.15,2525.49 1199.15,2525.49 1199.15,2496.49 1204.15,2491.49
  region net +5V: 1196.15,2464.49 1196.15,2823.49 1195.59,2824.05 1199.04,2827.49 1231.79,2827.49 1231.79,2462.62
  region net +5V: 1702.15,2957.49 1702.15,2915.49 1692.15,2905.49 1293.15,2905.49 1284.15,2914.49 1284.15,2954.49 1249.15,2954.49 1249.15,2877.49 1265.15,2877.49 793.15,2877.49 793.15,2804.49 793.15,2800.49 795.15,2800.49 1790.15,2800.49 1815.15,2825.49 1815.15,2957.49
  region net NetC8_1: 3584.15,163.49 3549.15,128.49 3223.15,128.49 3208.15,143.49 3208.15,190.49
  region net +3V3: 647.15,2136.49 647.15,2189.49 681.15,2189.49 681.15,2184.49 681.15,2136.49
  region net +3V3: 930.15,2067.49 930.15,2063.49 930.15,2038.49 844.15,2038.49 844.15,2067.49
  region net +3V3: 1116.15,2259.49 1116.15,2231.49 1212.59,2231.49 1212.59,2259.49
  region net +3V3: 1201.15,2089.49 1201.15,2087.49 1177.15,2063.49 1191.15,2049.49 1211.15,2049.49 1211.15,2070.49 1222.15,2081.49
  region net +3V3: 1045.15,2037.49 1045.15,2072.49 1195.15,2072.49 1195.15,2312.49 1231.15,2312.49 1231.15,2055.49 1213.15,2037.49
  region net +5V: 1174.15,2485.49 1175.15,2485.49 1207.15,2453.49 1212.04,2458.38 1212.04,2483.6 1202.04,2483.6 1188.15,2497.49
  region net +5V: 1070.15,2448.49 1070.15,2479.49 1073.15,2482.49 1196.15,2482.49 1196.15,2422 1232.12,2435.08 1232.12,2485.52 1212.15,2505.49 1062.15,2505.49 1053.15,2496.49 1053.15,2448.49
  region net +3V3: 2303.15,3197.49 2378.15,3197.49 2378.15,3416.49 2459.15,3416.49 2459.15,3352.49 2704.15,3352.49 2704.15,3449.49 2303.15,3449.49
  region net +5V: 1815.15,2957.49 1702.15,2957.49 1702.15,3363.33 1748.31,3409.49 2296.15,3409.49 2296.15,3347.05 1858.29,3347.05 1815.15,3303.91
  region net NetC14_2: 628.15,3122.49 653.15,3122.49 663.65,3132.99 663.65,3212.49 680.15,3230.49 687.15,3230.49 936.15,3230.49 1002.15,3164.49 1002.15,3121.49 1105.15,3121.49 1103.15,3211.49 1034.15,3211.49 978.15,3267.49 662.15,3267.49 643.15,3248.49 643.15,3164.24 638.97,3158.49 629.15,3158.49
  region net NetD4_2: 1265.15,3366.49 1500.15,3366.49 1529.15,3340.49 1529.15,3181.49 1409.15,3181.49 1409.15,3256.49 1385.15,3276.49 1265.15,3276.49
  region net NetD4_2: 562.15,3207.49 562.15,3324.49 603.84,3366.19 1073.41,3366.19 1073.41,3276.75 1073.15,3276.49 663.15,3276.49 635.15,3248.49 635.15,3205.49
  region net NetD4_2: 562.15,3207.49 562.15,3166.49 635.15,3166.49 635.15,3207.49
  region net NetC14_2: 531.15,3155.49 538.15,3148.49 543.15,3148.49 543.15,3154.96 547.76,3159.57
  region net NetC20_2: 591.15,3090.49 533.15,3090.49 516.86,3111.49 516.86,3121.3 525.15,3122.49 540,3103.49 590.73,3103.49 597.32,3096.9
  region net NetC14_2: 451.15,3177.49 344.15,3177.49 329.15,3162.49 329.15,3151.49
  region net NetC14_2: 203.15,3162.49 203.15,3100.49 452.15,3100.49 467.15,3114.49 467.15,3150.49 471.4,3154.22 537.1,3154.22 537.1,3137.54 562.15,3112.49 632.15,3112.49 632.15,3158.49 563.15,3158.49 443.15,3177.49 347.15,3162.49
  region net NetC9_2: 1340.15,3594.49 1398.15,3594.49 1398.15,3515.49 1340.15,3515.49
  region net NetC9_2: 1220.15,3528.49 1748.15,3528.49 1748.15,3463.49 1220.15,3463.49
  region net NetC9_2: 3469.15,602.49 3378.15,511.49 3378.15,504.49 3472.15,504.49 3523.15,555.49 3523.15,605.49
  region net NetC8_1: 130.15,541.49 3042.15,541.49 3042.15,282.49 3107.64,217 3240.15,217 3240.15,130.49 3238.15,128.49 864.15,128.49 863.15,129.49 865.15,131.49 865.15,225.49 130.15,225.49
  region net NetC8_1: 2318.15,3689.49 2329.15,3689.49 2333.15,3693.49 2333.15,3802.49 2352.65,3822 2378.15,3822 2378.15,3783.49 2364.15,3770.19 2364.15,3681.49 2342.15,3659.49 2316.94,3659.49
  region net NetC9_2: 2685.15,3706.49 2723.15,3706.49 2723.15,3538.49 2687.15,3538.49 2685.15,3538.49
  region net NetC9_2: 1947.15,3562.49 1971.15,3538.49 1971.15,3534.49 1945.81,3534.49 1942.67,3531.35
  region net NetC9_2: 1914.15,3586.49 1915.15,3585.49 1915.15,3463.49 2879.15,3463.49 2879.15,3543 1953.15,3543 1953.15,3586.49
  region net NetIC3_1: 2487.15,3688.49 2532.15,3688.49 2532.15,3619.49 2487.15,3619.49
  region net NetIC3_1: 2381.15,3687.49 2426.15,3687.49 2426.15,3620.49 2381.15,3620.49
  region net NetC8_1: 2205.43,3689.49 2318.65,3689.49 2318.65,3659.49 2240.86,3659.49 2240.86,3648.19 2205.43,3648.19
  region net NetC8_2: 2205.43,3734.8 2259.15,3734.8 2259.15,3724.3 2318.65,3724.3 2318.65,3700.68 2275.34,3700.68 2261.15,3700.68 2205.43,3700.68
  region net VCC: 1758.15,4321.49 1944.15,4321.49 1973.15,4292.49 1973.15,3860.49 1906.15,3860.49 1906.15,4261.49 1897.15,4270.49 1758.15,4270.49
  region net VIN: 1711.15,3971.49 1816.15,3971.49 1816.15,3900.49 1711.15,3900.49
  region net VIN: 1659.15,3690.49 1659.15,3616.49 1712.15,3616.49 1712.15,3690.49
  region net NetC9_2: 1739.15,3833.49 1739.15,3463.49 1953.34,3463.49 1953.34,3833.49
  region net VCC: 1601.78,3695.13 1636.15,3729.49 1600.15,3729.49
  region net VCC: 1431.15,3650 1431.15,3712.49 1545.15,3712.49 1559.15,3726.49 1559.15,3749.49 1573.15,3763.49 1714.15,3763.49 1714.15,3724.49 1604.15,3724.49 1604.15,3667.49 1586.65,3650
  region net VCC: 729.15,3413.49 1046.15,3413.49 1048.15,3413.49 1048.15,3527.49 961.15,3527.49 961.15,3547.49 729.15,3547.49
  region net +5V_B: 504.15,3527.49 554.15,3527.49 575.15,3506.49 575.15,3414.49 645.15,3414.49 656.15,3414.49 656.15,3581.49 618.15,3619.49 504.15,3619.49
  region net +5V_B: 411.15,3859.49 404.15,3859.49 390.15,3845.49 390.15,3715.49 328.15,3715.49 328.15,3879.49 370.15,3921.49 411.15,3921.49
  region net +5V_B: 1637.15,3935.49 1617.15,3915.49 1626.15,3906.49 1639.15,3906.49
  region net +5V_B: 1694.15,3920.49 1694.15,3930.49 1684.15,3930.49 1684.15,3920.49
  region net +5V_B: 1694.15,3921.49 1694.15,3891.49 1662.15,3859.49 410.15,3859.49 410.15,3909.49 410.15,3921.49
  region net +5V_B: 1759.15,4092.49 1733.15,4066.49 1668.9,4066.49 1634.64,4032.24 1634.64,3912.49 1677.15,3912.49 1694.15,3929.49 1694.15,4018.49 1764.11,4018.49 1809.11,4063.49 1809.11,4092.49
  region net +5V_B: 1759.15,4236.49 1809.15,4236.49 1809.15,4092.49 1768.15,4092.49 1766.15,4092.49 1764.15,4092.49 1759.15,4092.49
  region net VIN: 583.15,3733.49 649.15,3733.49 649.15,3703.49 666.15,3686.49 936.15,3686.49 936.15,3652.49 594.15,3652.49 583.15,3663.49
  region net +5V_B: 227.15,3738.49 304.15,3738.49 304.15,3715.49 227.15,3715.49
  region net +5V_B: 227.15,3549.49 304.15,3549.49 304.15,3527.49 227.15,3527.49
  region net +5V_B: 295.41,3738.49 504.15,3738.49 504.15,3527.49 295.41,3527.49
  region net NetC4_1: 1507.15,4064.49 1678.15,4223.49 1678.15,4278.49 1738.15,4278.49 1738.15,4179.49 1573.43,4019.94
  region net NetC4_1: 1158.15,4089.49 1158.15,3936.49 1577.15,3936.49 1577.15,4079.49 1577.15,4089.49
  region net NetC3_1: 467.15,4177.49 706.58,3938.06 1033.15,3938.06 1033.15,4074.49 982.51,4074.49 857,4201 638.15,4200.49 606.15,4232.49 606.15,4326.49 467.15,4326.49
  region net NetC3_1: 468.15,4326.49 537.15,4326.49 538.15,4325.49 538.15,4176.49 468.15,4176.49
Bottom Layer:
  pour cut-out: 3681.52,4527.92 cw(c3681.52,4646.03) 3563.41,4646.03 cw(c3681.52,4646.03) 3681.52,4764.14 cw(c3681.52,4646.03) 3799.63,4646.03 cw(c3681.52,4646.03)
  pour cut-out: 5.48,4529.04 cw(c5.48,4647.15) -112.63,4647.15 cw(c5.48,4647.15) 5.48,4765.26 cw(c5.48,4647.15) 123.59,4647.15 cw(c5.48,4647.15)
  pour cut-out: -0.9,-117.21 cw(c-0.9,0.9) -119.01,0.9 cw(c-0.9,0.9) -0.9,119.01 cw(c-0.9,0.9) 117.21,0.9 cw(c-0.9,0.9)
  pour cut-out: 3677.65,-117.21 cw(c3677.65,0.9) 3559.54,0.9 cw(c3677.65,0.9) 3677.65,119.01 cw(c3677.65,0.9) 3795.76,0.9 cw(c3677.65,0.9)
  region net VIN: 811.41,3688.25 924.41,3689.25 940.41,3673.25 940.41,3576.25
  region net VIN: 828.41,3603.25 865.41,3564.25 877.41,3621.25
  region net +5V: 2407.15,4324.49 2876.15,4324.49 2876.15,4212.49 2407.15,4212.49
  region net +5V: 2051.15,3429.49 2020.65,3398.99 2033.84,3385.8 2072.46,3385.8
  region net +5V: 2048.15,3595.49 2097.15,3595.49 2097.15,3357.49 2062.15,3322.49 2026.15,3322.49 2026.15,3405.49 2025.15,3406.49 2048.15,3406.49
  region net +5V: 2066.15,1225.49 2241.15,1225.49 2241.15,1194.49 2065.15,1194.49
  region net +5V: 2030.15,959.49 2030.15,1260.49 2069.15,1260.49 2069.15,960.49 2070.15,959.49
  region net +5V: 1131.15,1192.49 1131.15,955.49 1173.15,955.49 1173.15,958.49 1174.15,964.49 1174.15,1194.49
  region net +5V: 323.15,1950.49 268.15,1895.49 252.15,1895.49 252.15,1952.01 244.41,1959.75
  region net +5V: 377.15,2013.49 216.15,2013.49 197.15,1994.49 197.15,1939.49 405.53,1939.49
  region net +5V: 282.15,1993.49 227.15,1993.49 197.15,1963.49 197.15,905.49 230.15,872.49 242.15,872.49 2974.15,872.49 3037.15,935.49 3037.15,1588.86 3039.71,1591.43 3031.64,1599.49 2911.15,1599.49 2911.15,988.49 2892.15,969.49 2854.15,969.49 335.15,969.49 282.15,1022.49
  region net +5V: 2429.15,1898.49 2469.15,1898.49 2469.15,1637.49 2477.15,1629.49 3198.15,1629.49 3198.15,1580.49 3197.96,1580.31 2450.34,1580.31 2431.15,1599.49
  region net +5V: 628.15,1870.49 628.15,1865.49 666.15,1827.49 680.15,1841.49 680.15,1878.42
  region net +5V: 502.15,1960.49 502.15,1947.49 547.15,1902.49 557.15,1912.49 557.15,1945.49
  region net +5V: 376.15,2012.49 377.15,2013.49 559.15,2013.49 573.15,1999.49 573.15,1956.49 609.15,1920.49 692.15,1920.49 698.15,1914.49 698.15,1697.49 646.15,1697.49 646.15,1863.49 540.15,1863.49 527.15,1876.49 527.15,1939.49 376.15,1939.49
  region net VCC: 1467.15,3614.49 1467.15,3612.49 1460.15,3605.49 1308.15,3605.49 1308.15,3624.49 1306.15,3626.49
  region net VCC: 873.6,3770.04 959.15,3684.49 991.6,3684.49
  region net VCC: 1349.15,3625.49 1344.15,3625.49 1301.15,3582.49 1275.15,3608.49 1275.15,3628.49 1283.15,3628.49 1313.15,3658.49
  region net VCC: 1400.15,3838.49 1345.15,3783.49 1379.15,3783.49 1400.15,3762.49 1423.15,3785.49 1423.15,3806.49
  region net +5V: 1131.15,1334.49 1174.15,1334.49 1174.15,1191.49 1131.15,1191.49
  region net +3V3: 899.15,2064.49 899.15,2075.49 929.15,2075.49 943.15,2061.49 943.15,2060.49
  region net +3V3: 899.15,2048.49 911.15,2036.49 1119.1,2036.49 1147.15,2066.49 1147.15,2202.49 1107.15,2202.49 1107.15,2078.49 1095.15,2066.49 899.15,2066.49
  region net +3V3: 899.15,2069.49 899.15,2150.49 888.15,2161.49 652.15,2161.49 652.15,2187.49 917.15,2187.49 929.15,2175.49 929.15,2068.49
  region net +3V3: 1819.15,2842.49 1720.15,2743.49 1720.15,2739.49 1847.15,2739.49 1856.15,2730.49
  region net +3V3: 2623.11,3442.49 2711.15,3442.49 2711.15,3218.49 2687.15,3194.49 1903.15,3194.49 1891.15,3182.49 1891.15,2753.49 1849.15,2711.49 1444.15,2711.49 1409.15,2676.49 1409.15,2225.49 1383.15,2199.49 1107.15,2199.49 1107.15,2283.49 1277.15,2283.49 1319.15,2325.49 1318.15,2326.49 1318.15,2740.49 1374.15,2796.49 1808.15,2796.49 1808.15,3217.49 1864.15,3273.49 2601.15,3273.49 2625.15,3297.49
  region net +5V: 795.15,2875.49 796.15,2874.49 796.15,2806.49 1715.15,2806.49 1723.15,2806.49 1790.15,2869.49 1790.15,3255.49 1857.15,3322.49 2031.15,3322.49 2031.15,3406.49 1763.15,3406.49 1662.15,3305.49 1661.15,3305.49 1661.15,2932.49 1604.15,2875.49 802.15,2875.49
  region net VIN: 863.15,3599.49 940.15,3599.49 940.15,3429.49 945.15,3424.49 1621.15,3424.49 1659.15,3462.49 1659.15,3616.49 1742.15,3616.49 1742.15,3419.49 1664.15,3341.49 905.72,3341.49 863.15,3384.07
  region net NetIC3_1: 2391.15,3647.49 2523.15,3647.49 2523.15,3623.49 2391.15,3623.49
  region net VCC: 1889.15,3971.49 1888.15,3967.49 1914.15,3941.49 1925.31,3952.66 1925.31,3967.33
  region net VCC: 1467.15,3791.49 1393.15,3791.49 1393.15,4016.49 1432.15,4055.49 1935.15,4055.49 1958.15,4032.49 1958.15,3860.49 1905.15,3860.49 1905.15,3965.49 1743.15,3965.49 1485.15,3965.49 1467.15,3947.49
  region net VIN: 1659.15,3616.49 1742.15,3616.49 1742.15,3952.49 1659.15,3952.49
  region net VCC: 1467.15,3805.49 943.15,3805.49 506.15,3805.49 506.15,3706.49 949.15,3706.49 949.15,3456.49 1317.15,3456.49 1317.15,3613.49 1467.15,3613.49
  region net VIN: 342.15,3248.49 202.15,3248.49 202.15,3179.49 411.15,3179.49 470.15,3248.49 470.15,3534.49 535.15,3599.49 940.15,3599.49 886.09,3688.49 437.15,3688.49 368.15,3619.49 368.15,3278.49

## Silkscreen, mask and mechanical layers (free items; w line width, h text height)
Top Overlay:
  text "12VDC" at 328.15,4454.63 h70.87
  text "NC" at 2244.15,4151.63 h70.87
  text "RELAY" at 2124.15,4040.84 h70.87
  text "TYPE C" at 38.15,3954.63 h70.87
  text "5V" at 2254.15,3941.63 h70.87
  text "220VAC" at 3581.36,3478.43 h70.87 r90
  text "5V" at 898.87,2831.15 h59.06
  text "MISO" at 528.87,2821.15 h59.06
  text "SCK" at 538.87,2721.15 h59.06
  text "MOSI" at 898.87,2721.15 h59.06
  text "RESET" at 498.87,2621.15 h59.06
  text "GND" at 898.87,2621.15 h59.06
  text "PB5" at 1811.15,2419.63 h70.87
  text "SCL" at 231.15,2411.63 h70.87
  text "5V" at 2778.15,2354.63 h70.87
  text "NC" at 2978.15,2354.63 h70.87
  text "D1" at 2878.15,2353.84 h70.87
  text "PB4" at 1811.15,2318.85 h70.87
  text "SDA" at 221.15,2311.63 h70.87
  text "PB3" at 1811.15,2219.63 h70.87
  text "AREF" at 181.15,2210.84 h70.87
  text "5V" at 2776.15,2150.63 h70.87
  text "NC" at 2976.15,2150.63 h70.87
  text "D2" at 2876.15,2149.84 h70.87
  text "PB2" at 1811.15,2118.85 h70.87
  text "GND" at 211.15,2111.63 h70.87
  text "PB1" at 1811.15,2018.85 h70.87
  text "5V" at 2778.4,1957.74 h70.87
  text "D3" at 2878.4,1957.74 h70.87
  text "NC" at 2978.4,1957.74 h70.87
  text "5V" at 251.94,1947.8 h70.87
  text "PB0" at 1811.15,1919.63 h70.87
  text "3V3" at 231.94,1847.8 h70.87
  text "GND" at 211.94,1747.8 h70.87
  text "5V" at 2781.03,1743.25 h70.87
  text "D4" at 2881.03,1742.46 h70.87
  text "NC" at 2981.03,1743.25 h70.87
  text "PD7" at 1807.54,1706.73 h70.87
  text "RESET" at 141.94,1647.8 h70.87
  text "PD6" at 1807.54,1607.52 h70.87
  text "ADC0" at 181.15,1511.63 h70.87
  text "PC0" at 481.15,1511.63 h70.87
  text "PD5" at 1807.21,1507.52 h70.87
  text "PC1" at 481.15,1411.63 h70.87
  text "PD4" at 1807.74,1406.73 h70.87
  text "ADC1" at 181.15,1401.63 h70.87
  text "PC2" at 481.15,1311.63 h70.87
  text "PD3" at 1807.54,1307.52 h70.87
  text "ADC2" at 181.15,1301.63 h70.87
  text "ADC3" at 181.15,1211.63 h70.87
  text "PC3" at 481.15,1211.63 h70.87
  text "PD2" at 1808,1206.73 h70.87
  text ">" at 1631.15,1111.89 h70.87
  text "TX" at 1541.15,1108.84 h70.87
  text "PD1" at 1816.33,1106.73 h70.87
  text "ADC4" at 181.15,1101.63 h70.87
  text "PC4/SDA" at 471.15,1101.63 h70.87
  text "PD0" at 1807.67,1007.52 h70.87
  text "ADC5" at 181.15,1001.63 h70.87
  text "PC5/SCL" at 471.15,1001.63 h70.87
  text "RX<" at 1541.15,998.84 h70.87
Bottom Overlay:
  text "GND" at 2267.73,4529.24 h70.87
  text "V_ADAPTER" at 1793.08,4275.44 h70.87
  text "V_TYPEC" at 600.08,3758.09 h70.87
  text "V_BAT" at 1323.08,3547.44 h70.87
  text "5V" at 1971.15,3346.28 h70.87
  text "3V3" at 2767.15,3340.28 h70.87
  text "V_IN" at 401.74,3076.91 h70.87 r270
  text "GND" at 3226.79,2855 h70.87 r270
  text "3V3_DEBUG" at 1168.15,2329.44 h70.87
  text "5V_MCU" at 1113.15,1195.09 h70.87
  text "GND" at 1553.15,741.28 h70.87